# EAGLE board tabs1 (EAGLE 7.1.0)
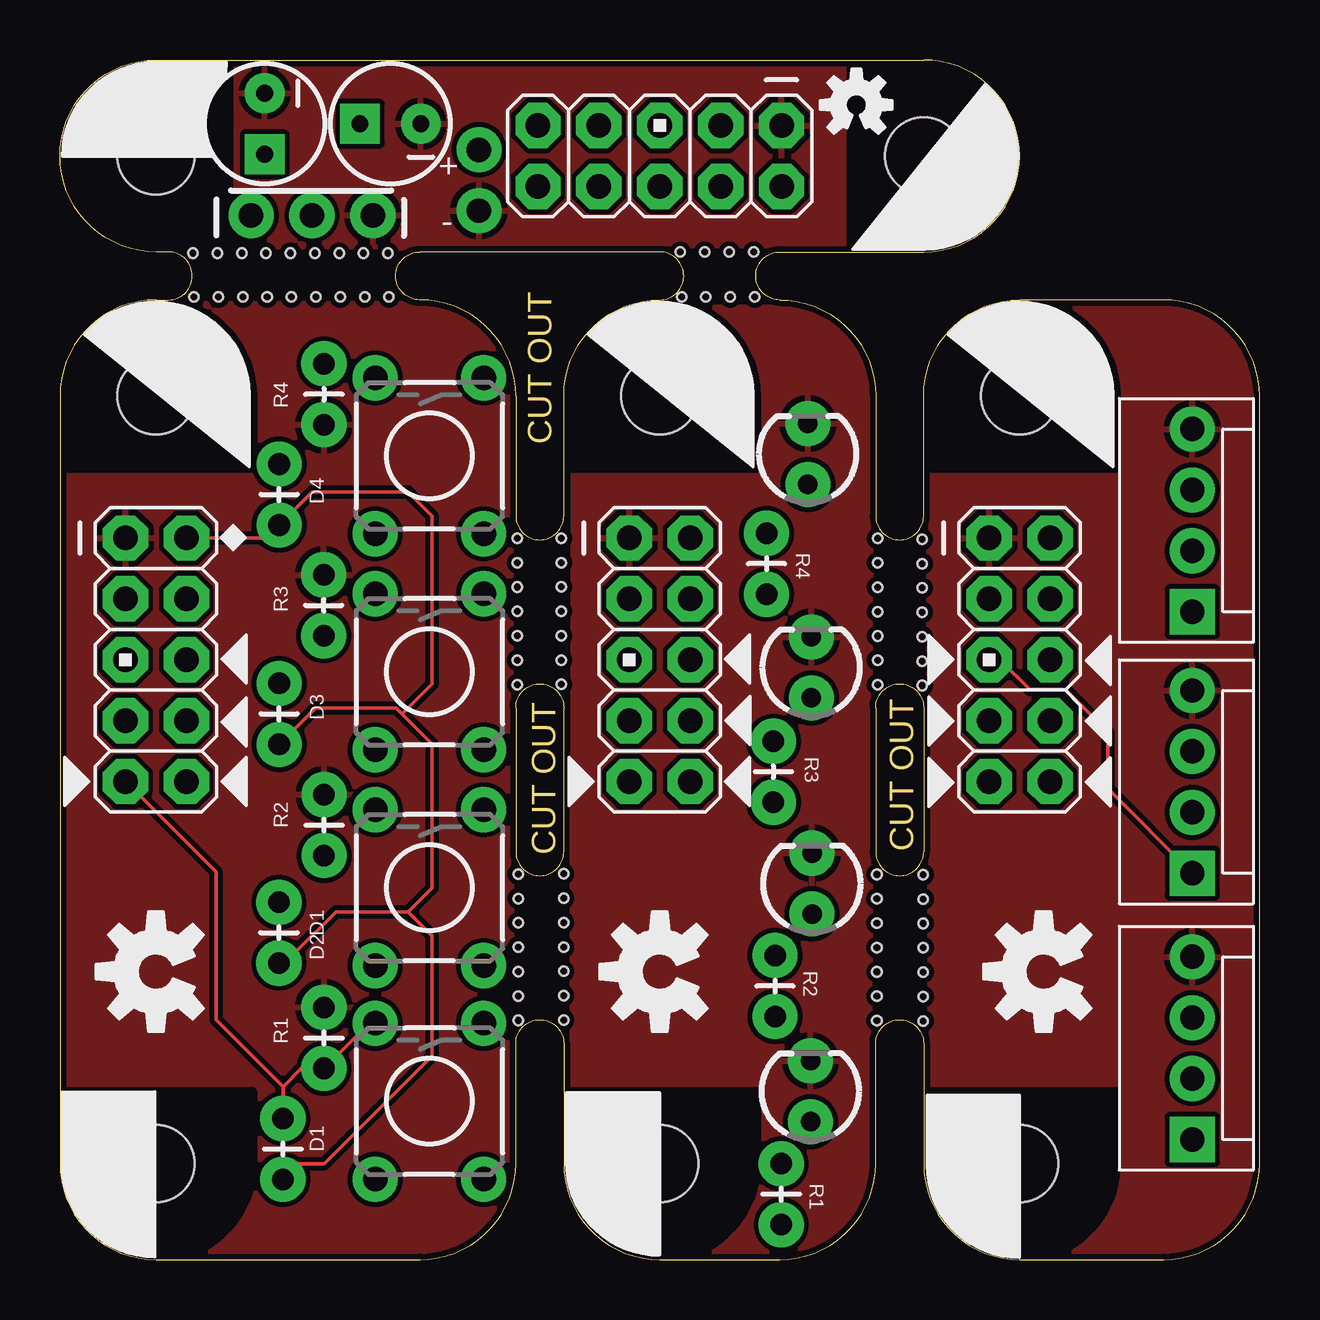
[diagram p0: board, top side]
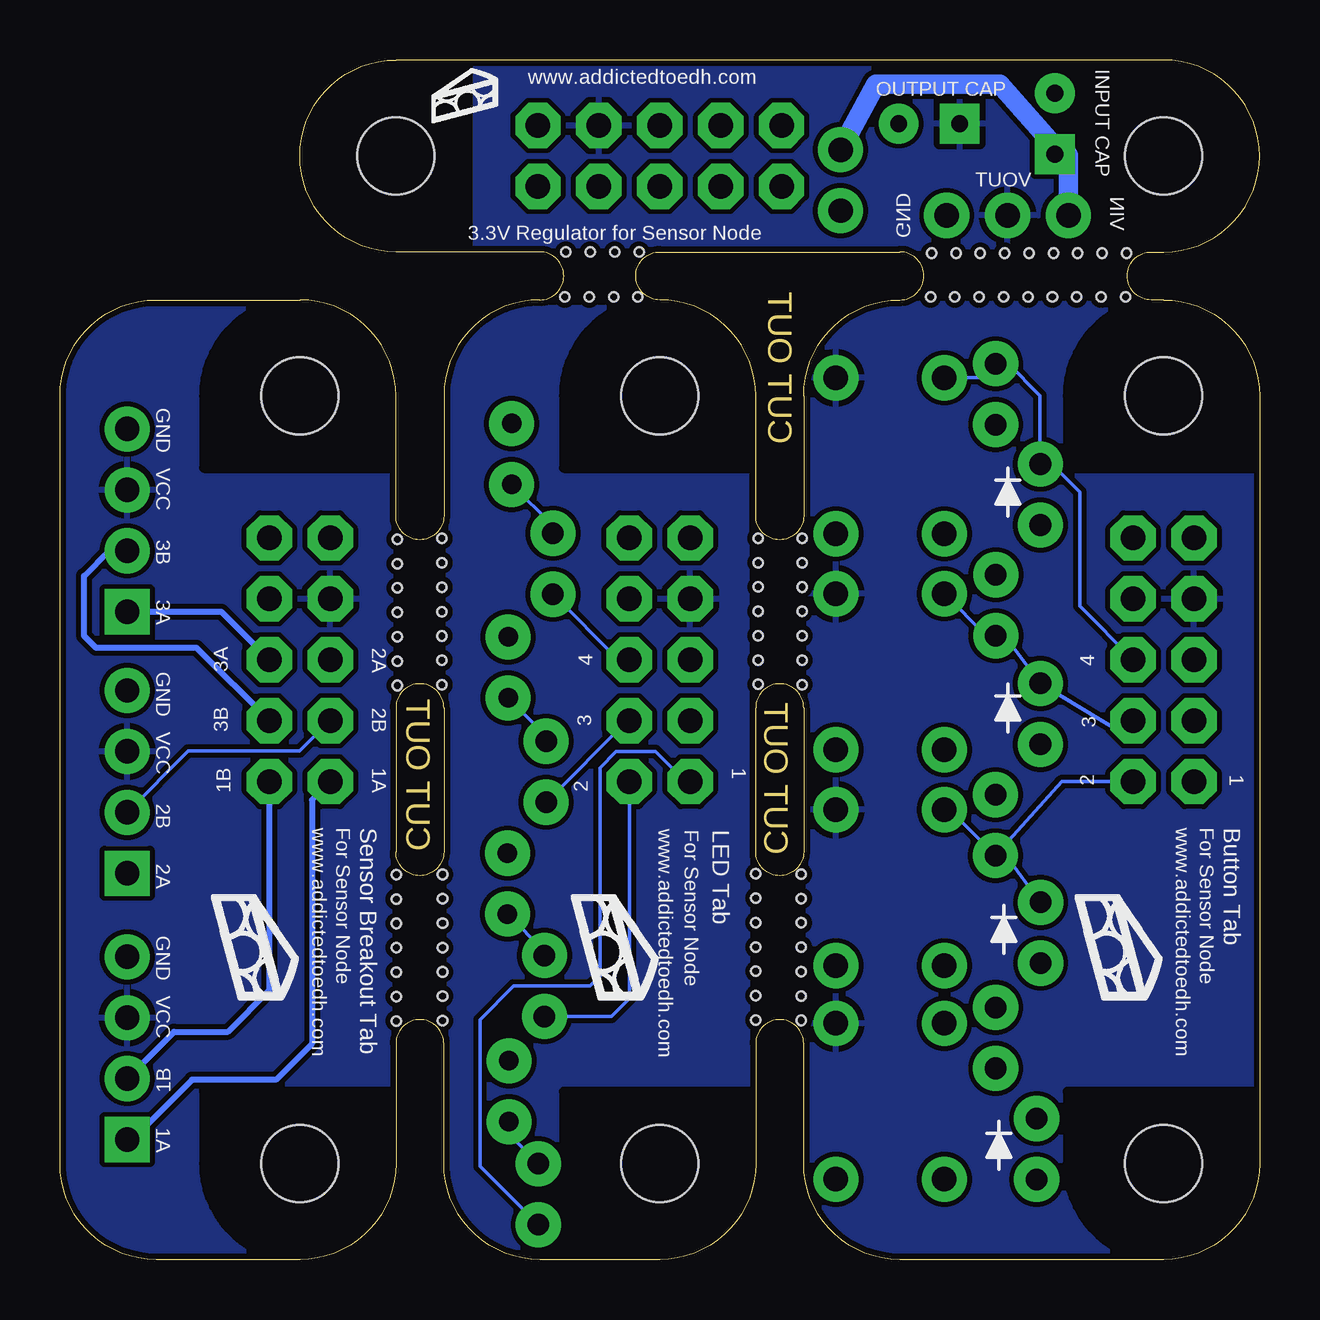
[diagram p1: board, bottom side, seen from below]

Size 50 x 50 mm. Coordinates in mm from the lower left corner, seen from the top.
Outline: 0,36 0,4 arc90 4,0 15,0 arc90 19,4 19,9 arc-90 20,10 arc-90 21,9 21,4 arc90 25,0 30,0 arc90 34,4 34,9 arc-90 35,10 arc-90 36,9 36,4 arc90 40,0 46,0 arc90 50,4 50,36 arc90 46,40 40,40 arc90 36,36 36,31 arc-90 35,30 arc-90 34,31 34,36 arc90 30,40 arc-90 29,41 arc-90 30,42 36,42 arc90 40,46 arc90 36,50 4,50 arc90 0,46 arc90 4,42 4.52,42 arc-90 5.52,41 arc-90 4.52,40 4,40 arc90 0,36
Outline: 19,23 19,17 arc90 20,16 arc90 21,17 21,23 arc90 20,24 arc90 19,23
Outline: 19,36 19,31 arc90 20,30 arc90 21,31 21,36 arc-90 25,40 arc90 26,41 arc90 25,42 14.99,42 arc90 13.99,41 arc90 14.99,40 15,40 arc-90 19,36
Outline: 34,23 34,17 arc90 35,16 arc90 36,17 36,23 arc90 35,24 arc90 34,23
Copper layers (1*16): Top 0.035mm / dielectric 1.5mm / Bottom 0.035mm
Design rules "DFRobot_Eagle_Rule_v0.4": minimum track width 6mil, minimum drill 12mil, track to track 6mil, track to pad 6mil, pad to pad 6mil, via to via 6mil, smd to smd 0mil, copper to edge 10mil, drill to drill 10mil, minimum pad ring 12mil, minimum via ring 8mil, stop-mask expansion 2mil, vias tented up to drill 25mil, thermal gap 10mil
Holes 0.38 mm at 5.59,40.13 6.6,40.13 7.62,40.13 8.64,40.13 9.65,40.13 10.67,40.13 11.68,40.13 12.7,40.13 13.72,40.13 5.54,41.95 6.56,41.95 7.57,41.95 8.59,41.95 9.61,41.95 10.62,41.95 11.64,41.95 12.65,41.95 13.67,41.95 25.91,40.13 26.92,40.13 27.94,40.13 28.96,40.13 25.86,41.99 26.88,41.99 27.89,41.99 28.91,41.99 19.07,30.06 19.07,29.05 19.07,28.03 19.07,27.02 19.07,26 19.07,24.98 19.07,23.97 20.9,23.97 20.9,24.99 20.9,26 20.9,27.02 20.9,28.03 20.9,29.05 20.9,30.07 20.99,9.98 20.99,11 20.99,12.01 20.99,13.03 20.99,14.04 20.99,15.06 20.99,16.08 19.1,9.97 19.1,10.99 19.1,12 19.1,13.02 19.1,14.03 19.1,15.05 19.1,16.07 35.98,9.95 35.98,10.96 35.98,11.98 35.98,12.99 35.98,14.01 35.98,15.03 35.98,16.04 34.05,9.96 34.05,10.97 34.05,11.99 34.05,13 34.05,14.02 34.05,15.04 34.05,16.05 35.94,23.93 35.94,24.94 35.94,25.96 35.94,26.97 35.94,27.99 35.94,29.01 35.94,30.02 34.08,23.96 34.08,24.97 34.08,25.99 34.08,27.01 34.08,28.02 34.08,29.04 34.08,30.05

## Footprints (pad centres in the part's own frame; a part is rotated, then mirrored left to right if it is on the bottom)
CPOL-RADIAL-10UF-25V = drill 0.7 pad 1.651 square: 1 1.27,0 | drill 0.7 pad 1.651: 2 -1.27,0
AVR_ICSP = drill 1.016 pad 1.88 octagon: 1 -1.27,5.08; 2 1.27,5.08; 3 -1.27,2.54; 4 1.27,2.54; 5 -1.27,0; 6 1.27,0; 7 -1.27,-2.54; 8 1.27,-2.54; 9 -1.27,-5.08; 10 1.27,-5.08
MOLEX-1X4 = drill 1.016 pad 1.88 square: 1 0,0 | drill 1.016 pad 1.88: 2 2.54,0; 3 5.08,0; 4 7.62,0
1X03_NO_SILK = drill 1.016 pad 1.88: 1 0,0; 2 2.54,0; 3 5.08,0
1X02_NO_SILK = drill 1.016 pad 1.88: 1 0,0; 2 2.54,0
LED3MM = drill 0.813 pad 1.88: A -1.27,0; K 1.27,0
AXIAL-0.1 = drill 0.9 pad 1.88: P$1 0,0; P$2 2.54,0
TACTILE-PTH = drill 1.016 pad 1.88: 1 -3.251,2.261; 2 3.251,2.261; 3 -3.251,-2.261; 4 3.251,-2.261
DP4010_V1_NOLINES = hole 3.2: 16,0; -16,0

## Placement (x,y rotation side)
C1  [CPOL-RADIAL-10UF-25V]  13.77,47.35 180 top
C2  [CPOL-RADIAL-10UF-25V]  8.53,47.34 270 top
JP1  M05X2PTH  [AVR_ICSP]  4,25 0 top
JP2  M05X2PTH  [AVR_ICSP]  40,25 0 top
JP3  M05X2PTH  [AVR_ICSP]  25,25 0 top
JP5  [MOLEX-1X4]  47.2,27 90 top
JP6  [MOLEX-1X4]  47.2,16.1 90 top
JP7  [MOLEX-1X4]  47.2,5 90 top
JP8  M05X2PTH  [AVR_ICSP]  25,46 270 top
JP9  [1X03_NO_SILK]  13.04,43.52 180 top
JP10  M021X02_NO_SILK  [1X02_NO_SILK]  17.46,46.26 270 top
LED1  [LED3MM]  31.28,7.01 90 top
LED2  [LED3MM]  31.17,33.58 90 top
LED3  [LED3MM]  31.32,24.68 90 top
LED4  [LED3MM]  31.35,15.67 90 top
R1  [AXIAL-0.1]  30.06,1.45 90 top
R2  [AXIAL-0.1]  29.45,27.73 90 top
R3  [AXIAL-0.1]  29.8,10.13 90 top
R4  [AXIAL-0.1]  29.74,19.06 90 top
R5  [AXIAL-0.1]  9.13,14.89 270 top
R6  [AXIAL-0.1]  9.13,24.01 270 top
R7  [AXIAL-0.1]  9.13,33.16 270 top
R8  [AXIAL-0.1]  9.29,5.88 270 top
R9  [AXIAL-0.1]  11,34.8 90 top
R10  [AXIAL-0.1]  10.99,28.54 270 top
R11  [AXIAL-0.1]  11.01,19.38 270 top
R12  [AXIAL-0.1]  11,10.51 270 top
S1  SWITCH-MOMENTARY-2PTH  [TACTILE-PTH]  15.4,6.6 270 top
S2  SWITCH-MOMENTARY-2PTH  [TACTILE-PTH]  15.4,15.5 270 top
S3  SWITCH-MOMENTARY-2PTH  [TACTILE-PTH]  15.4,24.5 270 top
S4  SWITCH-MOMENTARY-2PTH  [TACTILE-PTH]  15.4,33.5 270 top
U$1  [DP4010_V1_NOLINES]  4,20 90 top
U$2  [DP4010_V1_NOLINES]  25,20 90 top
U$3  [DP4010_V1_NOLINES]  40,20 90 top
U$4  [DP4010_V1_NOLINES]  20,46 180 top
U$5  [PI]  9,10 90 top
U$6  [PI]  30,10 90 top
U$7  [PI]  45,10 90 top
U$8  [OSHW-LOGO-M]  4,12 90 top
U$9  [OSHW-LOGO-M]  25,12 90 top
U$10  [OSHW-LOGO-M]  41,12 90 top
U$11  [OSHW-LOGO-S]  33.19,48.13 0 top
U$12  [PI_XS]  31.25,46.56 0 top

## Library data of the parts
C1 C2 = SparkFun-Capacitors
JP1-JP3 JP5-JP10 = SparkFun-Connectors
LED1-LED4 = SparkFun-LED
R1-R12 = SparkFun-Resistors
S1-S4 = SparkFun-Electromechanical
U$1-U$4 = dp_devices_mod
U$5-U$7 U$12 = mystuff
U$8-U$11 = SparkFun-Aesthetics

## Nets
GND1: C1.2 C2.2 JP8.1 JP9.1 JP10.2
GND2: JP3.1 LED1.K LED2.K LED3.K LED4.K
GND3: JP1.1 R9.P$1 R10.P$1 R11.P$1 R12.P$1
GND4: JP2.1 JP5.4 JP6.4 JP7.4
N$1: JP2.5 JP6.1
N$2: JP2.7 JP6.2
N$3: JP1.6 R7.P$1 R9.P$2 S4.3
N$4: JP1.8 R6.P$1 R10.P$2 S3.3
N$5: JP1.9 R8.P$1 R12.P$2 S1.3
N$6: JP1.2 R5.P$2 R6.P$2 R7.P$2 R8.P$2
N$7: JP2.8 JP5.2
N$8: LED4.A R3.P$2
N$9: LED3.A R4.P$2
N$10: LED2.A R2.P$2
N$11: LED1.A R1.P$2
N$12: JP3.9 R1.P$1
N$13: JP3.6 R2.P$1
N$14: JP3.8 R4.P$1
N$15: JP3.10 R3.P$1
N$16: JP1.10 R5.P$1 R11.P$2 S2.3
N$17: JP2.6 JP5.1
N$18: JP2.10 JP7.2
N$19: JP2.9 JP7.1
N$21: C2.1 JP9.3 JP10.1
VCC1: C1.1 JP8.3 JP9.2
VCC2: JP3.3
VCC3: JP1.3 S1.1 S2.1 S3.1 S4.1
VCC4: JP2.3 JP5.3 JP6.3 JP7.3

## Tracks (layer width: path | path; a pad name or v marks a point on that pad's centre or on a via)
GND1
  pour Top (isolate 0.203): 8.75,42.11 3.96,42.07 arc-90 0.17,45.82 arc-90 4.17,49.83 36.07,49.79 arc-90 39.75,46.1 arc-90 35.76,42.1
GND2
  pour Top (isolate 0.203): 29.77,39.71 25.37,39.67 arc89 21.41,35.68 21.35,4.19 arc91 25.4,0.19 29.81,0.24 arc89 33.76,4.24 33.81,35.7 arc91
GND3
  pour Top (isolate 0.203): 0.13,4.2 0.19,35.91 arc-90 4.19,39.91 14.92,39.92 arc-90 18.92,35.92 18.9,4.18 arc-90 14.9,0.18 4.13,0.2 arc-90
GND4
  pour Top (isolate 0.203): 49.81,4.27 49.78,35.74 arc90 45.78,39.73 40.22,39.73 arc90 36.22,35.73 36.22,4.27 arc89 40.14,0.27 42.25,0.23 45.85,0.26 arc90
N$1
  Top 0.152: JP2.5 39.19,25 40.43,23.75 41.91,23.75 43.67,21.99 43.67,19.63 JP6.1
N$2
  Bottom 0.152: JP2.7 40,21.19 44.65,21.19 JP6.2
N$3
  Bottom 0.152: JP1.6 7.5,27.23 7.5,32 9.13,33.63 R7.P$1 9.15,33.67 9.15,36.02 10.47,37.34 R9.P$2 11.59,36.75 S4.3
N$4
  Bottom 0.152: JP1.8 5.76,21.97 R6.P$1 10.62,26 R10.P$2 11.39,26 S3.3
N$5
  Top 0.152: JP1.9 6.5,16.15 6.5,10 9.29,7.21 | 9.29,7.21 R8.P$1 | 9.29,7.21 10.05,7.97 R12.P$2 12.88,9.85 S1.3
N$6
  Top 0.152: R8.P$2 9.46,4 11,4 15.5,8.5 15.5,13.5 14.5,14.5 | 14.5,14.5 11.5,14.5 9.85,12.85 R5.P$2 | R6.P$2 10.66,23 14,23 14.25,22.75 | 14.25,22.75 15.5,21.5 15.5,15.5 14.5,14.5 | 14.25,22.75 15.5,24 15.5,31 14.5,32 10.52,32 R7.P$2 8.6,30.08 JP1.2
N$7
  Bottom 0.254: JP2.8 44.31,25.5 48.5,25.5 49,26 49,28.5 47.96,29.54 JP5.2
N$8
  Bottom 0.152: LED4.A 29.8,12.85 R3.P$2
N$9
  Bottom 0.152: LED3.A 29.74,21.83 R4.P$2
N$10
  Bottom 0.152: LED2.A 29.45,30.59 R2.P$2
N$11
  Bottom 0.152: R1.P$2 31.28,5.21 LED1.A
N$12
  Bottom 0.152: R1.P$1 32.5,3.89 32.5,10 31.1,11.4 27.91,11.4 27.5,11.81 27.5,20.5 26.83,21.17 25.18,21.17 23.93,19.92 JP3.9
N$13
  Bottom 0.152: R2.P$1 26.72,25 JP3.6
N$14
  Bottom 0.152: R4.P$1 26.34,22.46 JP3.8
N$15
  Bottom 0.152: JP3.10 26.27,10.88 27.01,10.14 R3.P$1
N$16
  Bottom 0.152: R11.P$2 8.24,19.92 JP1.10 | R11.P$2 10.57,16.84 R5.P$1 9.52,15 | R11.P$2 12.92,18.75 S2.3
N$17
  Bottom 0.254: JP2.6 43.27,27 JP5.1
N$18
  Bottom 0.254: JP7.2 45.24,9.5 43,9.5 41.27,11.23 JP2.10
N$19
  Bottom 0.254: JP2.9 39.5,19.15 39.5,9 41,7.5 44.5,7.5 47,5 JP7.1
N$21
  Bottom 0.813: JP9.3 7.96,46.03 C2.1 8.46,46.33 10.82,48.99 16,49 JP10.1
VCC1
  pour Bottom (isolate 0.203): 8.75,42.11 3.96,42.07 arc-90 0.17,45.82 arc-90 4.17,49.83 36.07,49.79 arc-90 39.75,46.1 arc-90 35.76,42.1
VCC2
  pour Bottom (isolate 0.203): 29.77,39.71 25.37,39.67 arc89 21.41,35.68 21.35,4.19 arc91 25.4,0.19 29.81,0.24 arc89 33.76,4.24 33.81,35.7 arc91
VCC3
  pour Bottom (isolate 0.203): 0.13,4.2 0.19,35.91 arc-90 4.19,39.91 14.92,39.92 arc-90 18.92,35.92 18.9,4.18 arc-90 14.9,0.18 4.13,0.2 arc-90
VCC4
  pour Bottom (isolate 0.203): 49.81,4.27 49.78,35.74 arc90 45.78,39.73 40.22,39.73 arc90 36.22,35.73 36.22,4.27 arc89 40.14,0.27 42.25,0.23 45.85,0.26 arc90

## Text on the board
Dimension: CUT OUT | CUT OUT | CUT OUT
tPlace: + | - | R4 | D4 | R4 | R3 | D3 | R3 | R2 | D1 | D2 | R2 | R1 | D1 | R1
bPlace: INPUT CAP | www.addictedtoedh.com | OUTPUT CAP | VOUT | VIN | GND | 3.3V Regulator for Sensor Node | GND | VCC | 3B | 3A | 2A | 4 | 4 | 3A | GND | 2B | 3 | 3 | 3B | VCC | 1 | 2 | 1 | 2 | 1A | 1B | 2B | Button Tab | For Sensor Node | www.addictedtoedh.com | LED Tab | For Sensor Node | www.addictedtoedh.com | Sensor Breakout Tab | For Sensor Node | www.addictedtoedh.com | 2A | GND | VCC | 1B | 1A